# Altium PCB AVR最小系统板.PcbDoc (part 1 of 3)
Units mm, origin at the board's own origin, x right, y up, seen from the top; angles counter-clockwise.
Board outline 152.4 x 101.6 mm, 2 copper layers (Top Layer, Bottom Layer); 29 components, 54 nets, 170 pads, 0 vias.
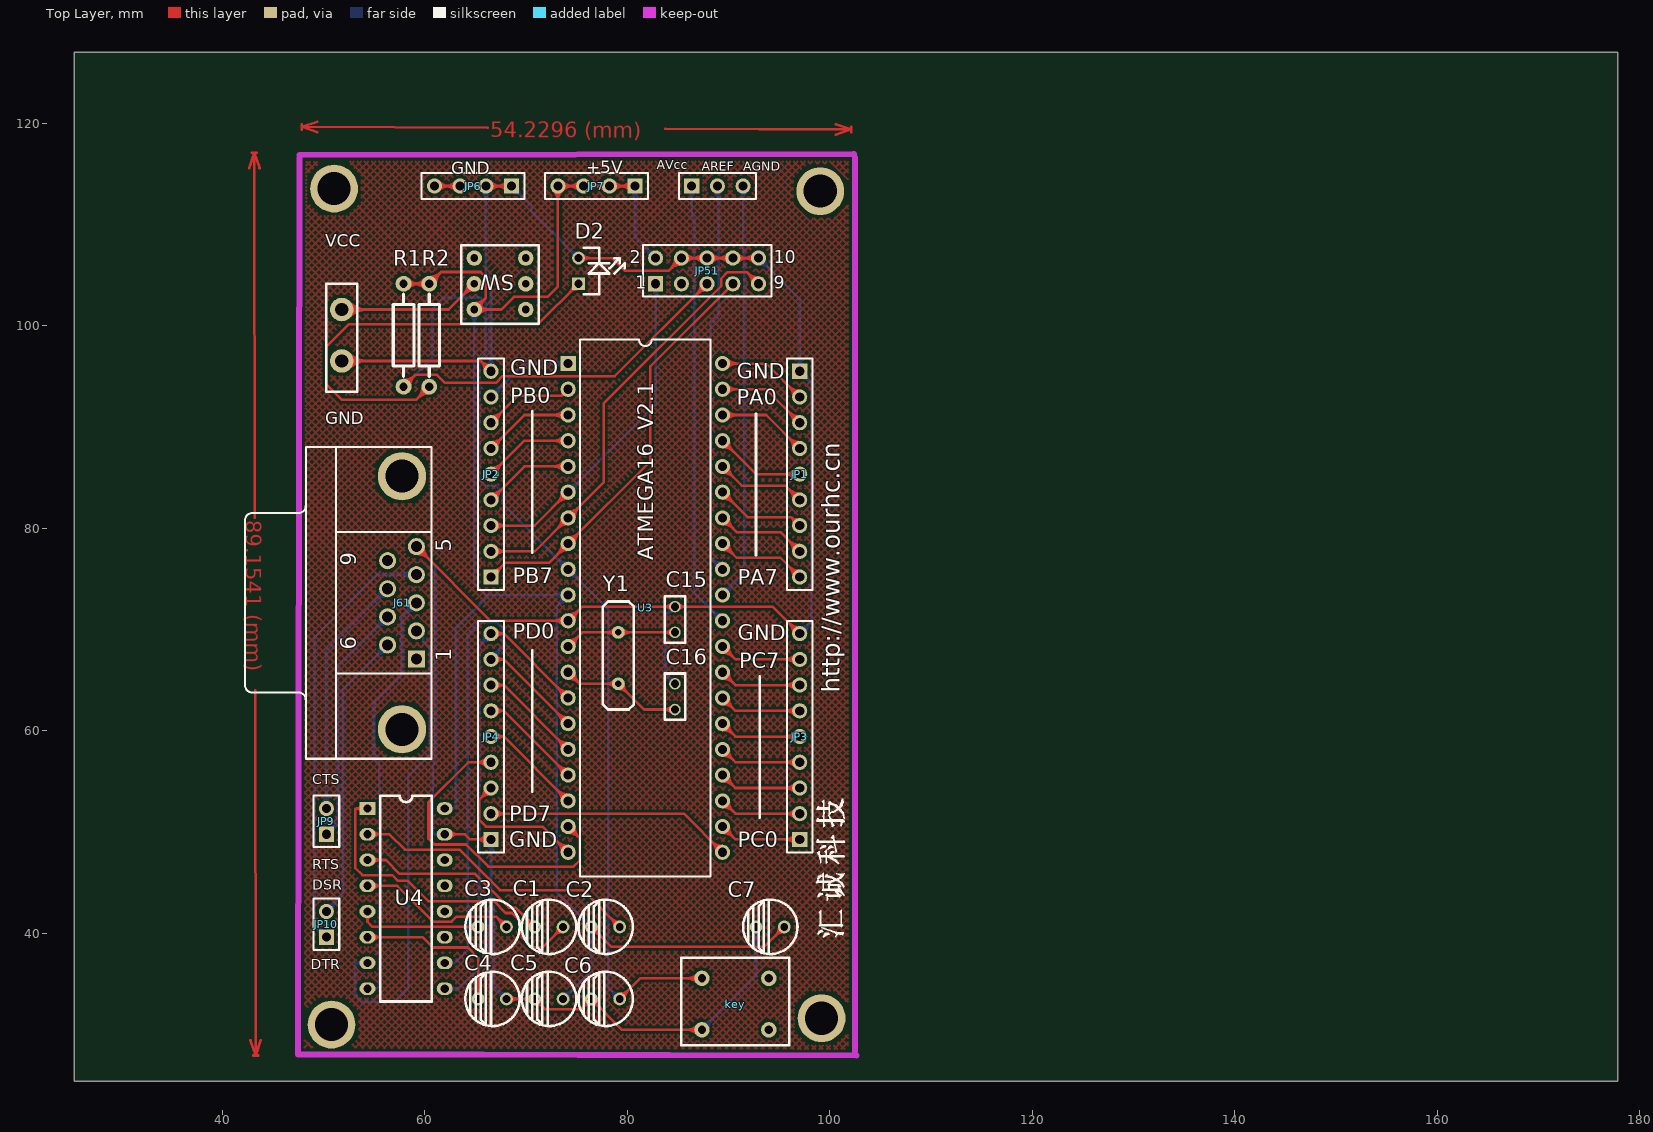
[diagram p0: Top Layer view]
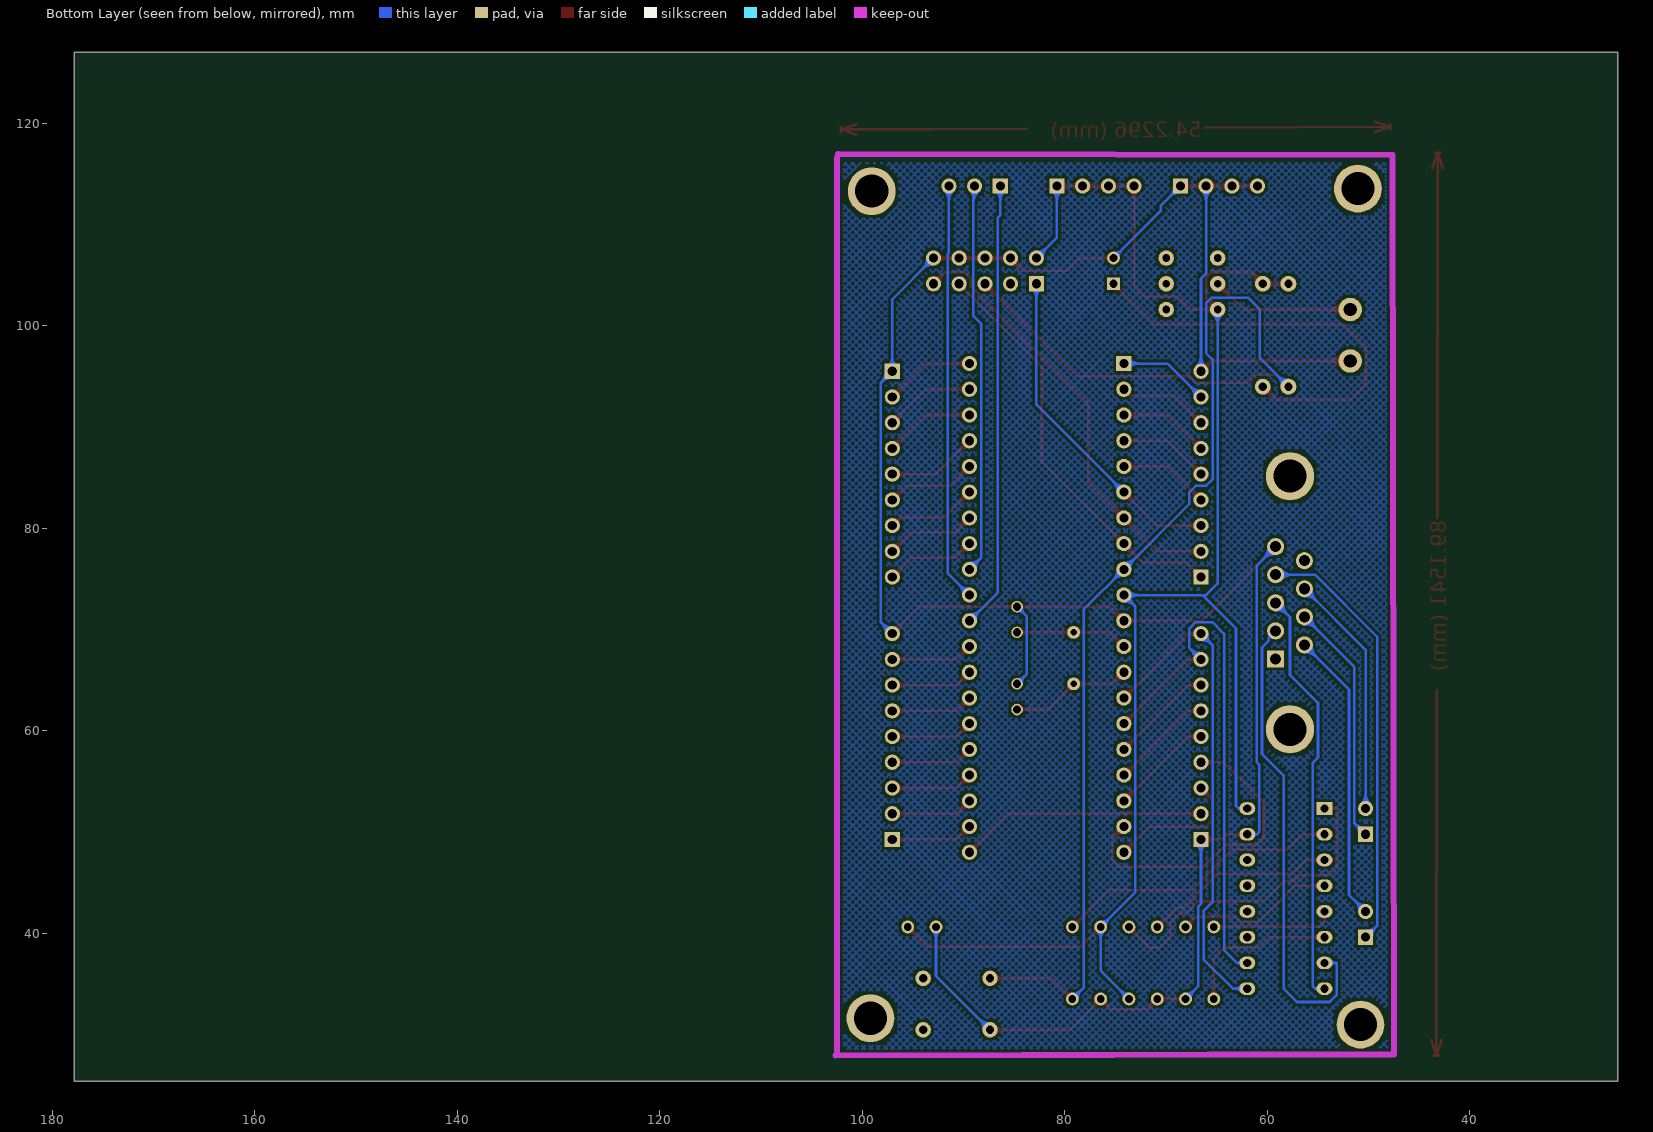
[diagram p1: Bottom Layer view, seen from below]

## Layer stack, top to bottom
Top Layer: signal copper 0.0356
Dielectric: dielectric 0.32, FR-4, Dk 4.8
Bottom Layer: signal copper 0.0356

## Board outline
25.4,25.4 177.8,25.4 177.8,127 25.4,127

## Design rules (kind name [scope] priority, off if disabled: settings)
Clearance [All] p1: gap=0.254
ComponentClearance [All] p1: gap=0.254 collisioncheckmode=0 verticalgap=0.254
PolygonConnect [All] p1: connectstyle=Relief reliefconductorwidth=0.254 reliefentries=4 polygonreliefangle="90 Angle"
RoutingVias [All] p1: holewidth=0.711 width=1.27 viastyle="Through Hole" minholewidth=0.711 minwidth=1.27 maxholewidth=0.711 maxwidth=1.27
SolderMaskExpansion [All] p1: expansion=0.102
TestPointUsage [All] p1: valid=0 allowmultiple=FALSE
Testpoint [All] p1: side=15 testpointundercomponent=TRUE minsize=1.016 maxsize=2.54 preferedsize=1.524 minholesize=0 maxholesize=1.016 preferedholesize=0.813 testpointgrid=0.025 style=1023 order=0123456789
Width [All] p1: maxlimit=0.254 minlimit=0.254 preferedwidth=0.254
17 further rules are at their usual default settings.

## Classes and differential pairs
component class Sheet1: 4/6 7/8 11 C1 C2 C3 C4 C5 C6 C7 C15 C16 D2 J61 JP1 JP2 JP3 JP4 JP5 key U3

## Components (designator, comment, footprint, x,y, rotation, side; value= is the part's Value field where it differs from the comment)
11 "power" power1 55.88,94.996 r90 top
C1 "1uf" cap2 78.232,40.64 r180 top
C2 "1uf" cap2 83.82,40.64 r180 top
C3 "1uf" cap2 72.644,40.64 r180 top
C4 "1uf" cap2 72.644,33.528 r180 top
C5 "1uf" cap2 78.232,33.528 r180 top
C6 "10uf" cap2 83.82,33.528 r180 top
C7 "360u\15v" cap2 100.076,40.64 r180 top
C15 "15p" RAD0.3 84.709,69.215 r90 top
C16 "15p" RAD0.3 84.709,61.595 r90 top
D2 "LED" LED 75.692,106.172 r270 top
J61 "D Connector 9" DSUB1.385-2H9 48.26,72.644 r90 top
JP1 "" HDR1X9 97.028,95.504 r270 top
JP2 "" HDR1X9 66.548,75.184 r90 top
JP3 "" HDR1X9 97.028,49.276 r90 top
JP4 "" HDR1X9 66.548,49.276 r90 top
JP5 "" HDR1X3 86.36,113.792 r0 top
JP6 "" HDR1X4 68.58,113.792 r180 top
JP7 "" HDR1X4 80.772,113.792 r180 top
JP9 "" HDR1X2 50.292,49.784 r90 top
JP10 "Header 3" HDR1X2 50.292,39.624 r90 top
JP51 "download" HDR2X5 82.804,104.14 r0 top
key "KEY" KEY-1 93.98,30.48 r180 top (schematic designator 1)
R1 "8.2k" AXIAL0.4 57.912,104.14 r270 top
R2 "4.7k" AXIAL0.4 60.452,104.14 r270 top
SW "KEY-33" key 70.612,104.14 r0 top (schematic designator RT)
U3 "ATmega16L-8PI" 40P6 81.788,72.136 r270 top
U4 "MAX232" DIP16 54.356,52.324 r0 top
Y1 "12M" CRYSTAL 80.137,67.183 r270 top

## Footprints (in the part's own frame and the unit in brackets; to place one, negate y for a bottom-side part, rotate by r counter-clockwise, add the part's x,y. Pads: shape width x height; smd on the part's side, far side on the other; paste and mask are expansions set on the pad)
40P6 [mm] "DIP; 40 Leads; Row Spacing 15.24 mm; Pitch 2.54 mm"
  rect 1.5x1.5 hole 0.9: 1(-24.13,-7.62)
  round 1.5 hole 0.9: 2(-21.59,-7.62) 3(-19.05,-7.62) 4(-16.51,-7.62) 5(-13.97,-7.62) 6(-11.43,-7.62) 7(-8.89,-7.62) 8(-6.35,-7.62) 9(-3.81,-7.62) 10(-1.27,-7.62) 11(1.27,-7.62) 12(3.81,-7.62) 13(6.35,-7.62) 14(8.89,-7.62) 15(11.43,-7.62) 16(13.97,-7.62) 17(16.51,-7.62) 18(19.05,-7.62) 19(21.59,-7.62) 20(24.13,-7.62) 21(24.13,7.62) 22(21.59,7.62) 23(19.05,7.62) 24(16.51,7.62) 25(13.97,7.62) 26(11.43,7.62) 27(8.89,7.62) 28(6.35,7.62) 29(3.81,7.62) 30(1.27,7.62) 31(-1.27,7.62) 32(-3.81,7.62) 33(-6.35,7.62) 34(-8.89,7.62) 35(-11.43,7.62) 36(-13.97,7.62) 37(-16.51,7.62) 38(-19.05,7.62) 39(-21.59,7.62) 40(-24.13,7.62)
  silkscreen extent -26.5,-6.45 26.5,6.45
AXIAL0.4 [mil]
  round 62 hole 32: 1(-0.15,-0.04) 2(399.85,-0.04)
  silkscreen extent 40,-40 360,40
cap2 [mil]
  round 50 hole 30: 1(180,0) 2(290,0)
  silkscreen extent 129,-106 340,106
CRYSTAL [mil]
  round 50 hole 25: 1(-100,-40) 2(100,-40)
  silkscreen extent -220,-100 200,20
DIP16 [mil]
  rect 62x49.21 hole 32: 1(-0.15,-0.04)
  oval 62x49.21 hole 32: 2(-0.15,-100.04) 3(-0.15,-200.04) 4(-0.15,-300.04) 5(-0.15,-400.04) 6(-0.15,-500.04) 7(-0.15,-600.04) 8(-0.15,-700.04) 9(299.85,-700.04) 10(299.85,-600.04) 11(299.85,-500.04) 12(299.85,-400.04) 13(299.85,-300.04) 14(299.85,-200.04) 15(299.85,-100.04) 16(299.85,-0.04)
  silkscreen extent 50,-750 250,50
DSUB1.385-2H9 [mm] "Connector; D Subminiature; 9 Position; Right Angle; Pitch 1.385 mm"
  rect 1.69x1.69 hole 1.09: 1(-5.54,-10.92)
  round 1.69 hole 1.09: 2(-2.77,-10.92) 3(0,-10.92) 4(2.77,-10.92) 5(5.54,-10.92) 6(-4.155,-8.08) 7(-1.385,-8.08) 8(1.385,-8.08) 9(4.155,-8.08)
  round 4.76 hole 3.26: 10(-12.495,-9.5) 11(12.495,-9.5)
  silkscreen extent -15.4,-12.4 15.4,6
HDR1X2 [mm] "Connector; Header; 2 Position"
  rect 1.5x1.5 hole 0.9: 1(0,0)
  round 1.5 hole 0.9: 2(2.54,0)
  silkscreen extent -1.27,-1.27 3.81,1.27
HDR1X3 [mm] "Connector; Header; 3 Position"
  rect 1.5x1.5 hole 0.9: 1(0,0)
  round 1.5 hole 0.9: 2(2.54,0) 3(5.08,0)
  silkscreen extent -1.27,-1.27 6.35,1.27
HDR1X4 [mm] "Connector; Header; 4 Position"
  rect 1.5x1.5 hole 0.9: 1(0,0)
  round 1.5 hole 0.9: 2(2.54,0) 3(5.08,0) 4(7.62,0)
  silkscreen extent -1.27,-1.27 8.89,1.27
HDR1X9 [mm] "Connector; Header; 9 Position"
  rect 1.5x1.5 hole 0.9: 1(0,0)
  round 1.5 hole 0.9: 2(2.54,0) 3(5.08,0) 4(7.62,0) 5(10.16,0) 6(12.7,0) 7(15.24,0) 8(17.78,0) 9(20.32,0)
  silkscreen extent -1.27,-1.27 21.59,1.27
HDR2X5 [mm] "Connector; Header; 5x2 Position"
  rect 1.5x1.5 hole 0.9: 1(0,0)
  round 1.5 hole 0.9: 2(0,2.54) 3(2.54,0) 4(2.54,2.54) 5(5.08,0) 6(5.08,2.54) 7(7.62,0) 8(7.62,2.54) 9(10.16,0) 10(10.16,2.54)
  silkscreen extent -1.27,-1.27 11.43,3.81
key [mil]
  round 60 hole 30: 0(-225,100) 1(-225,0) 2(-225,-100) 3(-25,-100) 4(-25,0) 5(-25,100)
  silkscreen extent -275,-155 25,150
KEY-1 [mil] "KEY"
  round 60 hole 32: 0(0,0) 1(260,0) 2(0,-200) 3(260,-200)
  silkscreen extent -80,-280 340,60
LED [mil]
  rect 50x50 hole 32: 1(80,-20)
  round 50 hole 32: 2(-20,-20)
  silkscreen extent -60,0 120,160
power1 [mm] "power"
  round 2.32 hole 1.32: 2(1.524,4.064) "VCC +5V"(6.604,4.064)
  silkscreen extent -1.52,2.54 9.14,5.59
RAD0.3 [mil]
  round 45 hole 32: 1(20,0) 2(120,0)
  silkscreen extent -20,-40 160,40

## Part data
C1 C2 C3 C4 C5 C6 C7: library part "CAPACITOR POL", "Capacitor"
C15 C16: library part CAP, "Capacitor"
J61: "Receptacle Assembly, 9 Position, Right Angle"
JP1 JP2 JP3 JP4: library part "Header 9", "Header, 9-Pin"
JP5: library part "Header 3", "Header, 3-Pin"
JP6 JP7: library part "Header 4", "Header, 4-Pin"
JP9 JP10: library part "Header 2", "Header, 2-Pin"
JP51: library part "Header 5X2", "Header, 5-Pin, Dual row"
R1 R2: library part RES2
U3: "8-Bit AVR Microcontroller with 16K Bytes of In-System Programmable Flash Memory"
Y1: library part CRYSTAL, "Crystal"

## Free pads (board coordinates)
  round 4.72 hole 3.267: 0(51.054,113.538) 1(99.06,113.284) 2(50.8,30.988) 3(99.187,31.623)

## Nets (pads, with @x,y where several pads share a name; then routed paths per layer and width w, separated by ;. In a path a pad name is that pad's centre, name@x,y a point inside that pad or via, vN(x,y) a via of type N, cw(c..) or ccw(c..) an arc to the next point about the centre after c; other vN are vias at no path point)
4: J61.4 JP10.1 | length 67.4
  Bottom Layer w0.254: JP10.1@50.292,39.624 49.149,40.767 49.149,69.291 55.272,75.414 J61.4@59.18,75.414 ; 49.228,40.688 cw(c48.165,39.624) JP10.1@49.669,39.624 ; 49.228,40.688 ccw(c50.292,41.751) JP10.1@50.292,40.247 ; 49.228,40.688 cw(c48.165,39.624) JP10.1@49.669,39.624 ; 49.228,40.688 ccw(c50.292,41.751) JP10.1@50.292,40.247 ; 49.228,40.688 cw(c48.165,39.624) JP10.1@49.669,39.624 ; 49.228,40.688 ccw(c50.292,41.751) JP10.1@50.292,40.247 ; JP10.1@49.662,40.254 cw(c49.032,39.624) JP10.1@49.923,39.624 ; JP10.1@49.662,40.254 ccw(c50.292,40.884) JP10.1@50.292,39.993 ; JP10.1@49.662,40.254 cw(c49.032,39.624) JP10.1@49.923,39.624 ; JP10.1@49.662,40.254 ccw(c50.292,40.884) JP10.1@50.292,39.993 ; JP10.1@49.662,40.254 cw(c49.032,39.624) JP10.1@49.923,39.624 ; JP10.1@49.662,40.254 ccw(c50.292,40.884) JP10.1@50.292,39.993 ; 57.447,75.414 cw(c57.447,73.681) J61.4@58.672,74.906 ; 57.447,75.414 ccw(c57.447,77.147) J61.4@58.672,75.922 ; 57.447,75.414 cw(c57.447,73.681) J61.4@58.672,74.906 ; 57.447,75.414 ccw(c57.447,77.147) J61.4@58.672,75.922 ; 57.447,75.414 cw(c57.447,73.681) J61.4@58.672,74.906 ; 57.447,75.414 ccw(c57.447,77.147) J61.4@58.672,75.922 ; 58.06,75.414 cw(c58.06,74.294) J61.4@58.852,75.086 ; 58.06,75.414 ccw(c58.06,76.534) J61.4@58.852,75.742 ; 58.06,75.414 cw(c58.06,74.294) J61.4@58.852,75.086 ; 58.06,75.414 ccw(c58.06,76.534) J61.4@58.852,75.742 ; 58.06,75.414 cw(c58.06,74.294) J61.4@58.852,75.086 ; 58.06,75.414 ccw(c58.06,76.534) J61.4@58.852,75.742
6: J61.6 JP10.2 | length 53.6
  Bottom Layer w0.254: JP10.2@50.292,42.164 51.931,43.803 51.931,64.08 J61.6@56.34,68.489 ; JP10.2@50.292,42.533 ccw(c50.292,43.424) 50.922,42.794 ; JP10.2@50.292,42.533 ccw(c50.292,43.424) 50.922,42.794 ; JP10.2@50.292,42.533 ccw(c50.292,43.424) 50.922,42.794 ; JP10.2@50.292,42.787 ccw(c50.292,44.291) 51.356,43.228 ; JP10.2@50.292,42.787 ccw(c50.292,44.291) 51.356,43.228 ; JP10.2@50.292,42.787 ccw(c50.292,44.291) 51.356,43.228 ; JP10.2@50.661,42.164 cw(c51.552,42.164) 50.922,42.794 ; JP10.2@50.661,42.164 cw(c51.552,42.164) 50.922,42.794 ; JP10.2@50.661,42.164 cw(c51.552,42.164) 50.922,42.794 ; JP10.2@50.915,42.164 cw(c52.419,42.164) 51.356,43.228 ; JP10.2@50.915,42.164 cw(c52.419,42.164) 51.356,43.228 ; JP10.2@50.915,42.164 cw(c52.419,42.164) 51.356,43.228 ; 55.114,67.263 cw(c56.34,66.038) J61.6@56.34,67.771 ; 55.114,67.263 ccw(c53.889,68.489) J61.6@55.622,68.489 ; 55.114,67.263 cw(c56.34,66.038) J61.6@56.34,67.771 ; 55.114,67.263 ccw(c53.889,68.489) J61.6@55.622,68.489 ; 55.114,67.263 cw(c56.34,66.038) J61.6@56.34,67.771 ; 55.114,67.263 ccw(c53.889,68.489) J61.6@55.622,68.489 ; 55.548,67.697 cw(c56.34,66.905) J61.6@56.34,68.025 ; 55.548,67.697 ccw(c54.756,68.489) J61.6@55.876,68.489 ; 55.548,67.697 cw(c56.34,66.905) J61.6@56.34,68.025 ; 55.548,67.697 ccw(c54.756,68.489) J61.6@55.876,68.489 ; 55.548,67.697 cw(c56.34,66.905) J61.6@56.34,68.025 ; 55.548,67.697 ccw(c54.756,68.489) J61.6@55.876,68.489
7: J61.7 JP9.1 | length 48.7
  Bottom Layer w0.254: JP9.1@50.292,49.784 51.423,50.915 51.423,66.342 J61.7@56.34,71.259 ; JP9.1@50.292,50.153 ccw(c50.292,51.044) JP9.1@50.922,50.414 ; JP9.1@50.292,50.153 ccw(c50.292,51.044) JP9.1@50.922,50.414 ; JP9.1@50.292,50.153 ccw(c50.292,51.044) JP9.1@50.922,50.414 ; JP9.1@50.292,50.407 ccw(c50.292,51.911) 51.356,50.848 ; JP9.1@50.292,50.407 ccw(c50.292,51.911) 51.356,50.848 ; JP9.1@50.292,50.407 ccw(c50.292,51.911) 51.356,50.848 ; JP9.1@50.661,49.784 cw(c51.552,49.784) JP9.1@50.922,50.414 ; JP9.1@50.661,49.784 cw(c51.552,49.784) JP9.1@50.922,50.414 ; JP9.1@50.661,49.784 cw(c51.552,49.784) JP9.1@50.922,50.414 ; JP9.1@50.915,49.784 cw(c52.419,49.784) 51.356,50.848 ; JP9.1@50.915,49.784 cw(c52.419,49.784) 51.356,50.848 ; JP9.1@50.915,49.784 cw(c52.419,49.784) 51.356,50.848 ; 55.114,70.033 cw(c56.34,68.808) J61.7@56.34,70.541 ; 55.114,70.033 ccw(c53.889,71.259) J61.7@55.622,71.259 ; 55.114,70.033 cw(c56.34,68.808) J61.7@56.34,70.541 ; 55.114,70.033 ccw(c53.889,71.259) J61.7@55.622,71.259 ; 55.114,70.033 cw(c56.34,68.808) J61.7@56.34,70.541 ; 55.114,70.033 ccw(c53.889,71.259) J61.7@55.622,71.259 ; 55.548,70.467 cw(c56.34,69.675) J61.7@56.34,70.795 ; 55.548,70.467 ccw(c54.756,71.259) J61.7@55.876,71.259 ; 55.548,70.467 cw(c56.34,69.675) J61.7@56.34,70.795 ; 55.548,70.467 ccw(c54.756,71.259) J61.7@55.876,71.259 ; 55.548,70.467 cw(c56.34,69.675) J61.7@56.34,70.795 ; 55.548,70.467 ccw(c54.756,71.259) J61.7@55.876,71.259
8: J61.8 JP9.2 | length 48.9
  Bottom Layer w0.254: JP9.2@50.292,52.324 50.292,67.981 J61.8@56.34,74.029 ; JP9.2@49.851,52.765 ccw(c48.788,53.828) 50.292,53.828 ; JP9.2@49.851,52.765 ccw(c48.788,53.828) 50.292,53.828 ; JP9.2@49.851,52.765 ccw(c48.788,53.828) 50.292,53.828 ; JP9.2@50.031,52.585 ccw(c49.401,53.215) 50.292,53.215 ; JP9.2@50.031,52.585 ccw(c49.401,53.215) 50.292,53.215 ; JP9.2@50.031,52.585 ccw(c49.401,53.215) 50.292,53.215 ; 50.292,53.215 ccw(c51.183,53.215) JP9.2@50.553,52.585 ; 50.292,53.215 ccw(c51.183,53.215) JP9.2@50.553,52.585 ; 50.292,53.215 ccw(c51.183,53.215) JP9.2@50.553,52.585 ; 50.292,53.828 ccw(c51.796,53.828) JP9.2@50.733,52.765 ; 50.292,53.828 ccw(c51.796,53.828) JP9.2@50.733,52.765 ; 50.292,53.828 ccw(c51.796,53.828) JP9.2@50.733,52.765 ; 55.114,72.803 cw(c56.34,71.578) J61.8@56.34,73.311 ; 55.114,72.803 ccw(c53.889,74.029) J61.8@55.622,74.029 ; 55.114,72.803 cw(c56.34,71.578) J61.8@56.34,73.311 ; 55.114,72.803 ccw(c53.889,74.029) J61.8@55.622,74.029 ; 55.114,72.803 cw(c56.34,71.578) J61.8@56.34,73.311 ; 55.114,72.803 ccw(c53.889,74.029) J61.8@55.622,74.029 ; 55.548,73.237 cw(c56.34,72.445) J61.8@56.34,73.565 ; 55.548,73.237 ccw(c54.756,74.029) J61.8@55.876,74.029 ; 55.548,73.237 cw(c56.34,72.445) J61.8@56.34,73.565 ; 55.548,73.237 ccw(c54.756,74.029) J61.8@55.876,74.029 ; 55.548,73.237 cw(c56.34,72.445) J61.8@56.34,73.565 ; 55.548,73.237 ccw(c54.756,74.029) J61.8@55.876,74.029
GND: 11.2 C4.1 C5.2 C6.2 C7.2 C15.2 C16.2 D2.2 J61.5 JP1.1 JP2.9 JP3.9 JP4.1 JP6.1 JP6.2 JP6.3 JP6.4 JP51.4 JP51.6 JP51.8 JP51.10 key.1 U3.11 U4.15 | length 682.3
  Top Layer w0.254: 11.2@51.816,96.52 65.532,96.52 ; J61.5@59.18,78.184 66.498,70.866 U3.11@74.168,70.866 75.565,72.263 C15.2@84.709,72.263 94.361,72.263 JP3.9@97.028,69.596 ; JP6.4@60.96,113.792 JP6.3@63.5,113.792 JP6.2@66.04,113.792 JP6.1@68.58,113.792 ; U4.15@61.972,49.783 63.983,49.783 64.49,49.276 JP4.1@66.548,49.276 ; JP2.9@66.548,95.504 65.532,96.52 ; C4.1@68.072,33.528 C5.2@70.866,33.528 71.882,32.512 75.438,32.512 C6.2@76.454,33.528 79.502,30.48 key.1@87.376,30.48 ; D2.2@75.184,106.68 78.486,106.68 79.756,105.41 84.074,105.41 JP51.4@85.344,106.68 JP51.8@90.424,106.68 JP51.10@92.964,106.68 ; 11.2@52.187,96.149 cw(c53.083,95.253) 53.083,96.52 ; 11.2@52.187,96.149 cw(c53.083,95.253) 53.083,96.52 ; 11.2@52.187,96.149 cw(c53.083,95.253) 53.083,96.52 ; 11.2@52.187,96.891 ccw(c53.083,97.787) 53.083,96.52 ; 11.2@52.187,96.891 ccw(c53.083,97.787) 53.083,96.52 ; 11.2@52.187,96.891 ccw(c53.083,97.787) 53.083,96.52 ; 11.2@52.367,95.969 cw(c53.697,94.639) 53.697,96.52 ; 11.2@52.367,95.969 cw(c53.697,94.639) 53.697,96.52 ; 11.2@52.367,95.969 cw(c53.697,94.639) 53.697,96.52 ; 11.2@52.367,97.071 ccw(c53.697,98.401) 53.697,96.52 ; 11.2@52.367,97.071 ccw(c53.697,98.401) 53.697,96.52 ; 11.2@52.367,97.071 ccw(c53.697,98.401) 53.697,96.52 ; 11.2@52.546,95.79 cw(c54.31,94.026) 54.31,96.52 ; 11.2@52.546,95.79 cw(c54.31,94.026) 54.31,96.52 ; 11.2@52.546,95.79 cw(c54.31,94.026) 54.31,96.52 ; 11.2@52.546,97.25 ccw(c54.31,99.014) 54.31,96.52 ; 11.2@52.546,97.25 ccw(c54.31,99.014) 54.31,96.52 ; 11.2@52.546,97.25 ccw(c54.31,99.014) 54.31,96.52 ; J61.5@59.18,77.466 cw(c59.18,75.733) 60.406,76.958 ; J61.5@59.18,77.466 cw(c59.18,75.733) 60.406,76.958 ; J61.5@59.18,77.466 cw(c59.18,75.733) 60.406,76.958 ; J61.5@59.18,77.72 cw(c59.18,76.6) 59.972,77.392 ; J61.5@59.18,77.72 cw(c59.18,76.6) 59.972,77.392 ; J61.5@59.18,77.72 cw(c59.18,76.6) 59.972,77.392 ; J61.5@59.644,78.184 ccw(c60.764,78.184) 59.972,77.392 ; J61.5@59.644,78.184 ccw(c60.764,78.184) 59.972,77.392 ; J61.5@59.644,78.184 ccw(c60.764,78.184) 59.972,77.392 ; J61.5@59.898,78.184 ccw(c61.631,78.184) 60.406,76.958 ; J61.5@59.898,78.184 ccw(c61.631,78.184) 60.406,76.958 ; J61.5@59.898,78.184 ccw(c61.631,78.184) 60.406,76.958 ; JP6.4@61.221,113.531 cw(c61.851,112.901) 61.851,113.792 ; JP6.4@61.221,113.531 cw(c61.851,112.901) 61.851,113.792 ; JP6.4@61.221,113.531 cw(c61.851,112.901) 61.851,113.792 ; JP6.4@61.221,114.053 ccw(c61.851,114.683) 61.851,113.792 ; JP6.4@61.221,114.053 ccw(c61.851,114.683) 61.851,113.792 ; JP6.4@61.221,114.053 ccw(c61.851,114.683) 61.851,113.792 ; JP6.4@61.401,113.351 cw(c62.464,112.288) 62.464,113.792 ; JP6.4@61.401,113.351 cw(c62.464,112.288) 62.464,113.792 ; JP6.4@61.401,113.351 cw(c62.464,112.288) 62.464,113.792 ; JP6.4@61.401,114.233 ccw(c62.464,115.296) 62.464,113.792 ; JP6.4@61.401,114.233 ccw(c62.464,115.296) 62.464,113.792 ; JP6.4@61.401,114.233 ccw(c62.464,115.296) 62.464,113.792 ; 61.996,113.792 cw(c61.996,112.288) JP6.3@63.059,113.351 ; 61.996,113.792 ccw(c61.996,115.296) JP6.3@63.059,114.233 ; 61.996,113.792 cw(c61.996,112.288) JP6.3@63.059,113.351 ; 61.996,113.792 ccw(c61.996,115.296) JP6.3@63.059,114.233 ; 61.996,113.792 cw(c61.996,112.288) JP6.3@63.059,113.351 ; 61.996,113.792 ccw(c61.996,115.296) JP6.3@63.059,114.233 ; U4.15@62.487,49.431 cw(c63.337,48.581) 63.337,49.783 ; U4.15@62.487,49.431 cw(c63.337,48.581) 63.337,49.783 ; U4.15@62.487,49.431 cw(c63.337,48.581) 63.337,49.783 ; U4.15@62.487,50.135 ccw(c63.337,50.985) 63.337,49.783 ; U4.15@62.487,50.135 ccw(c63.337,50.985) 63.337,49.783 ; U4.15@62.487,50.135 ccw(c63.337,50.985) 63.337,49.783 ; 62.609,113.792 cw(c62.609,112.901) JP6.3@63.239,113.531 ; 62.609,113.792 ccw(c62.609,114.683) JP6.3@63.239,114.053 ; 62.609,113.792 cw(c62.609,112.901) JP6.3@63.239,113.531 ; 62.609,113.792 ccw(c62.609,114.683) JP6.3@63.239,114.053 ; 62.609,113.792 cw(c62.609,112.901) JP6.3@63.239,113.531 ; 62.609,113.792 ccw(c62.609,114.683) JP6.3@63.239,114.053 ; JP6.3@63.761,113.531 cw(c64.391,112.901) 64.391,113.792 ; JP6.3@63.761,113.531 cw(c64.391,112.901) 64.391,113.792 ; JP6.3@63.761,113.531 cw(c64.391,112.901) 64.391,113.792 ; JP6.3@63.761,114.053 ccw(c64.391,114.683) 64.391,113.792 ; JP6.3@63.761,114.053 ccw(c64.391,114.683) 64.391,113.792 ; JP6.3@63.761,114.053 ccw(c64.391,114.683) 64.391,113.792 ; JP6.3@63.941,113.351 cw(c65.004,112.288) 65.004,113.792 ; JP6.3@63.941,113.351 cw(c65.004,112.288) 65.004,113.792 ; JP6.3@63.941,113.351 cw(c65.004,112.288) 65.004,113.792 ; JP6.3@63.941,114.233 ccw(c65.004,115.296) 65.004,113.792 ; JP6.3@63.941,114.233 ccw(c65.004,115.296) 65.004,113.792 ; JP6.3@63.941,114.233 ccw(c65.004,115.296) 65.004,113.792 ; 64.536,113.792 cw(c64.536,112.288) JP6.2@65.599,113.351 ; 64.536,113.792 ccw(c64.536,115.296) JP6.2@65.599,114.233 ; 64.536,113.792 cw(c64.536,112.288) JP6.2@65.599,113.351 ; 64.536,113.792 ccw(c64.536,115.296) JP6.2@65.599,114.233 ; 64.536,113.792 cw(c64.536,112.288) JP6.2@65.599,113.351 ; 64.536,113.792 ccw(c64.536,115.296) JP6.2@65.599,114.233 ; 65.044,49.276 cw(c65.044,47.772) JP4.1@66.107,48.835 ; 65.044,49.276 ccw(c65.044,50.78) JP4.1@66.107,49.717 ; 65.044,49.276 cw(c65.044,47.772) JP4.1@66.107,48.835 ; 65.044,49.276 ccw(c65.044,50.78) JP4.1@66.107,49.717 ; 65.044,49.276 cw(c65.044,47.772) JP4.1@66.107,48.835 ; 65.044,49.276 ccw(c65.044,50.78) JP4.1@66.107,49.717 ; 65.149,113.792 cw(c65.149,112.901) JP6.2@65.779,113.531 ; 65.149,113.792 ccw(c65.149,114.683) JP6.2@65.779,114.053 ; 65.149,113.792 cw(c65.149,112.901) JP6.2@65.779,113.531 ; 65.149,113.792 ccw(c65.149,114.683) JP6.2@65.779,114.053 ; 65.149,113.792 cw(c65.149,112.901) JP6.2@65.779,113.531 ; 65.149,113.792 ccw(c65.149,114.683) JP6.2@65.779,114.053 ; 65.532,96.52 cw(c64.581,95.569) JP2.9@65.925,95.524 ; 65.532,96.52 ccw(c66.483,97.471) JP2.9@66.528,96.127 ; 65.532,96.52 cw(c64.581,95.569) JP2.9@65.925,95.524 ; 65.532,96.52 ccw(c66.483,97.471) JP2.9@66.528,96.127 ; 65.532,96.52 cw(c64.581,95.569) JP2.9@65.925,95.524 ; 65.532,96.52 ccw(c66.483,97.471) JP2.9@66.528,96.127 ; 65.657,49.276 cw(c65.657,48.385) JP4.1@66.287,49.015 ; 65.657,49.276 ccw(c65.657,50.167) JP4.1@66.287,49.537 ; 65.657,49.276 cw(c65.657,48.385) JP4.1@66.287,49.015 ; 65.657,49.276 ccw(c65.657,50.167) JP4.1@66.287,49.537 ; 65.657,49.276 cw(c65.657,48.385) JP4.1@66.287,49.015 ; 65.657,49.276 ccw(c65.657,50.167) JP4.1@66.287,49.537 ; 65.946,96.106 cw(c65.383,95.542) JP2.9@66.179,95.516 ; 65.946,96.106 ccw(c66.51,96.669) JP2.9@66.536,95.873 ; 65.946,96.106 cw(c65.383,95.542) JP2.9@66.179,95.516 ; 65.946,96.106 ccw(c66.51,96.669) JP2.9@66.536,95.873 ; 65.946,96.106 cw(c65.383,95.542) JP2.9@66.179,95.516 ; 65.946,96.106 ccw(c66.51,96.669) JP2.9@66.536,95.873 ; JP6.2@66.301,113.531 cw(c66.931,112.901) 66.931,113.792 ; JP6.2@66.301,113.531 cw(c66.931,112.901) 66.931,113.792 ; JP6.2@66.301,113.531 cw(c66.931,112.901) 66.931,113.792 ; JP6.2@66.301,114.053 ccw(c66.931,114.683) 66.931,113.792 ; JP6.2@66.301,114.053 ccw(c66.931,114.683) 66.931,113.792 ; JP6.2@66.301,114.053 ccw(c66.931,114.683) 66.931,113.792 ; JP6.2@66.481,113.351 cw(c67.544,112.288) 67.544,113.792 ; JP6.2@66.481,113.351 cw(c67.544,112.288) 67.544,113.792 ; JP6.2@66.481,113.351 cw(c67.544,112.288) 67.544,113.792 ; JP6.2@66.481,114.233 ccw(c67.544,115.296) 67.544,113.792 ; JP6.2@66.481,114.233 ccw(c67.544,115.296) 67.544,113.792 ; JP6.2@66.481,114.233 ccw(c67.544,115.296) 67.544,113.792 ; 67.076,113.792 cw(c67.076,112.288) JP6.1@68.139,113.351 ; 67.076,113.792 ccw(c67.076,115.296) JP6.1@68.139,114.233 ; 67.076,113.792 cw(c67.076,112.288) JP6.1@68.139,113.351 ; 67.076,113.792 ccw(c67.076,115.296) JP6.1@68.139,114.233 ; 67.076,113.792 cw(c67.076,112.288) JP6.1@68.139,113.351 ; 67.076,113.792 ccw(c67.076,115.296) JP6.1@68.139,114.233 ; 67.689,113.792 cw(c67.689,112.901) JP6.1@68.319,113.531 ; 67.689,113.792 ccw(c67.689,114.683) JP6.1@68.319,114.053 ; 67.689,113.792 cw(c67.689,112.901) JP6.1@68.319,113.531 ; 67.689,113.792 ccw(c67.689,114.683) JP6.1@68.319,114.053 ; 67.689,113.792 cw(c67.689,112.901) JP6.1@68.319,113.531 ; 67.689,113.792 ccw(c67.689,114.683) JP6.1@68.319,114.053 ; C4.1@68.431,33.169 cw(c69.298,32.302) 69.298,33.528 ; C4.1@68.431,33.169 cw(c69.298,32.302) 69.298,33.528 ; C4.1@68.431,33.169 cw(c69.298,32.302) 69.298,33.528 ; C4.1@68.431,33.887 ccw(c69.298,34.754) 69.298,33.528 ; C4.1@68.431,33.887 ccw(c69.298,34.754) 69.298,33.528 ; C4.1@68.431,33.887 ccw(c69.298,34.754) 69.298,33.528 ; 69.64,33.528 cw(c69.64,32.302) C5.2@70.507,33.169 ; 69.64,33.528 ccw(c69.64,34.754) C5.2@70.507,33.887 ; 69.64,33.528 cw(c69.64,32.302) C5.2@70.507,33.169 ; 69.64,33.528 ccw(c69.64,34.754) C5.2@70.507,33.887 ; 69.64,33.528 cw(c69.64,32.302) C5.2@70.507,33.169 ; 69.64,33.528 ccw(c69.64,34.754) C5.2@70.507,33.887 ; C5.2@70.866,33.02 cw(c70.866,31.794) 71.733,32.661 ; C5.2@70.866,33.02 cw(c70.866,31.794) 71.733,32.661 ; C5.2@70.866,33.02 cw(c70.866,31.794) 71.733,32.661 ; C5.2@71.374,33.528 ccw(c72.6,33.528) 71.733,32.661 ; C5.2@71.374,33.528 ccw(c72.6,33.528) 71.733,32.661 ; C5.2@71.374,33.528 ccw(c72.6,33.528) 71.733,32.661 ; 72.664,70.866 cw(c72.664,69.362) U3.11@73.727,70.425 ; 72.664,70.866 ccw(c72.664,72.37) U3.11@73.727,71.307 ; 72.664,70.866 cw(c72.664,69.362) U3.11@73.727,70.425 ; 72.664,70.866 ccw(c72.664,72.37) U3.11@73.727,71.307 ; 72.664,70.866 cw(c72.664,69.362) U3.11@73.727,70.425 ; 72.664,70.866 ccw(c72.664,72.37) U3.11@73.727,71.307 ; 73.277,70.866 cw(c73.277,69.975) U3.11@73.907,70.605 ; 73.277,70.866 ccw(c73.277,71.757) U3.11@73.907,71.127 ; 73.277,70.866 cw(c73.277,69.975) U3.11@73.907,70.605 ; 73.277,70.866 ccw(c73.277,71.757) U3.11@73.907,71.127 ; 73.277,70.866 cw(c73.277,69.975) U3.11@73.907,70.605 ; 73.277,70.866 ccw(c73.277,71.757) U3.11@73.907,71.127 ; U3.11@74.168,71.235 ccw(c74.168,72.126) 74.798,71.496 ; U3.11@74.168,71.235 ccw(c74.168,72.126) 74.798,71.496 ; U3.11@74.168,71.235 ccw(c74.168,72.126) 74.798,71.496 ; U3.11@74.168,71.489 ccw(c74.168,72.993) 75.232,71.93 ; U3.11@74.168,71.489 ccw(c74.168,72.993) 75.232,71.93 ; U3.11@74.168,71.489 ccw(c74.168,72.993) 75.232,71.93 ; U3.11@74.537,70.866 cw(c75.428,70.866) 74.798,71.496 ; U3.11@74.537,70.866 cw(c75.428,70.866) 74.798,71.496 ; U3.11@74.537,70.866 cw(c75.428,70.866) 74.798,71.496 ; U3.11@74.791,70.866 cw(c76.295,70.866) 75.232,71.93 ; U3.11@74.791,70.866 cw(c76.295,70.866) 75.232,71.93 ; U3.11@74.791,70.866 cw(c76.295,70.866) 75.232,71.93 ; 75.587,32.661 cw(c76.454,31.794) C6.2@76.454,33.02 ; 75.587,32.661 ccw(c74.72,33.528) C6.2@75.946,33.528 ; 75.587,32.661 cw(c76.454,31.794) C6.2@76.454,33.02 ; 75.587,32.661 ccw(c74.72,33.528) C6.2@75.946,33.528 ; 75.587,32.661 cw(c76.454,31.794) C6.2@76.454,33.02 ; 75.587,32.661 ccw(c74.72,33.528) C6.2@75.946,33.528 ; 76.41,106.68 cw(c76.41,107.906) 75.543,107.039 ccw(c76.41,107.906) 76.41,106.68 ; 76.41,106.68 ccw(c76.41,105.454) 75.543,106.321 cw(c76.41,105.454) 76.41,106.68 ; C6.2@76.454,33.02 cw(c76.454,31.794) 77.321,32.661 ; C6.2@76.454,33.02 cw(c76.454,31.794) 77.321,32.661 ; C6.2@76.454,33.02 cw(c76.454,31.794) 77.321,32.661 ; C6.2@76.962,33.528 ccw(c78.188,33.528) 77.321,32.661 ; C6.2@76.962,33.528 ccw(c78.188,33.528) 77.321,32.661 ; C6.2@76.962,33.528 ccw(c78.188,33.528) 77.321,32.661 ; 83.636,72.263 cw(c83.636,71.19) C15.2@84.395,71.949 ; 83.636,72.263 ccw(c83.636,73.336) C15.2@84.395,72.577 ; 83.636,72.263 cw(c83.636,71.19) C15.2@84.395,71.949 ; 83.636,72.263 ccw(c83.636,73.336) C15.2@84.395,72.577 ; 83.636,72.263 cw(c83.636,71.19) C15.2@84.395,71.949 ; 83.636,72.263 ccw(c83.636,73.336) C15.2@84.395,72.577 ; 84.28,105.616 cw(c85.344,104.553) 85.344,106.057 ccw(c85.344,104.553) 84.28,105.616 ; 84.28,105.616 ccw(c83.217,106.68) 84.721,106.68 cw(c83.217,106.68) 84.28,105.616 ; 84.714,106.05 cw(c85.344,105.42) 85.344,106.311 ccw(c85.344,105.42) 84.714,106.05 ; 84.714,106.05 ccw(c84.084,106.68) 84.975,106.68 cw(c84.084,106.68) 84.714,106.05 ; C15.2@85.023,71.949 cw(c85.782,71.19) 85.782,72.263 ; C15.2@85.023,71.949 cw(c85.782,71.19) 85.782,72.263 ; C15.2@85.023,71.949 cw(c85.782,71.19) 85.782,72.263 ; C15.2@85.023,72.577 ccw(c85.782,73.336) 85.782,72.263 ; C15.2@85.023,72.577 ccw(c85.782,73.336) 85.782,72.263 ; C15.2@85.023,72.577 ccw(c85.782,73.336) 85.782,72.263 ; 85.843,30.48 cw(c85.843,28.947) key.1@86.927,30.031 ; 85.843,30.48 ccw(c85.843,32.013) key.1@86.927,30.929 ; 85.843,30.48 cw(c85.843,28.947) key.1@86.927,30.031 ; 85.843,30.48 ccw(c85.843,32.013) key.1@86.927,30.929 ; 85.843,30.48 cw(c85.843,28.947) key.1@86.927,30.031 ; 85.843,30.48 ccw(c85.843,32.013) key.1@86.927,30.929 ; 86.235,106.68 cw(c86.235,107.571) 85.605,106.941 ccw(c86.235,107.571) 86.235,106.68 ; 86.235,106.68 ccw(c86.235,105.789) 85.605,106.419 cw(c86.235,105.789) 86.235,106.68 ; 86.38,106.68 cw(c86.38,105.176) 87.443,106.239 ccw(c86.38,105.176) 86.38,106.68 ; 86.38,106.68 ccw(c86.38,108.184) 87.443,107.121 cw(c86.38,108.184) 86.38,106.68 ; 86.456,30.48 cw(c86.456,29.56) key.1@87.107,30.211 ; 86.456,30.48 ccw(c86.456,31.4) key.1@87.107,30.749 ; 86.456,30.48 cw(c86.456,29.56) key.1@87.107,30.211 ; 86.456,30.48 ccw(c86.456,31.4) key.1@87.107,30.749 ; 86.456,30.48 cw(c86.456,29.56) key.1@87.107,30.211 ; 86.456,30.48 ccw(c86.456,31.4) key.1@87.107,30.749 ; 86.848,106.68 cw(c86.848,108.184) 85.785,107.121 ccw(c86.848,108.184) 86.848,106.68 ; 86.848,106.68 ccw(c86.848,105.176) 85.785,106.239 cw(c86.848,105.176) 86.848,106.68 ; 86.993,106.68 cw(c86.993,105.789) 87.623,106.419 ccw(c86.993,105.789) 86.993,106.68 ; 86.993,106.68 ccw(c86.993,107.571) 87.623,106.941 cw(c86.993,107.571) 86.993,106.68 ; JP51.6@88.145,106.419 cw(c88.775,105.789) 88.775,106.68 ; JP51.6@88.145,106.419 cw(c88.775,105.789) 88.775,106.68 ; JP51.6@88.145,106.419 cw(c88.775,105.789) 88.775,106.68 ; JP51.6@88.145,106.941 ccw(c88.775,107.571) 88.775,106.68 ; JP51.6@88.145,106.941 ccw(c88.775,107.571) 88.775,106.68 ; JP51.6@88.145,106.941 ccw(c88.775,107.571) 88.775,106.68 ; JP51.6@88.325,106.239 cw(c89.388,105.176) 89.388,106.68 ; JP51.6@88.325,106.239 cw(c89.388,105.176) 89.388,106.68 ; JP51.6@88.325,106.239 cw(c89.388,105.176) 89.388,106.68 ; JP51.6@88.325,107.121 ccw(c89.388,108.184) 89.388,106.68 ; JP51.6@88.325,107.121 ccw(c89.388,108.184) 89.388,106.68 ; JP51.6@88.325,107.121 ccw(c89.388,108.184) 89.388,106.68 ; 88.92,106.68 cw(c88.92,105.176) JP51.8@89.983,106.239 ; 88.92,106.68 ccw(c88.92,108.184) JP51.8@89.983,107.121 ; 88.92,106.68 cw(c88.92,105.176) JP51.8@89.983,106.239 ; 88.92,106.68 ccw(c88.92,108.184) JP51.8@89.983,107.121 ; 88.92,106.68 cw(c88.92,105.176) JP51.8@89.983,106.239 ; 88.92,106.68 ccw(c88.92,108.184) JP51.8@89.983,107.121 ; 89.533,106.68 cw(c89.533,105.789) JP51.8@90.163,106.419 ; 89.533,106.68 ccw(c89.533,107.571) JP51.8@90.163,106.941 ; 89.533,106.68 cw(c89.533,105.789) JP51.8@90.163,106.419 ; 89.533,106.68 ccw(c89.533,107.571) JP51.8@90.163,106.941 ; 89.533,106.68 cw(c89.533,105.789) JP51.8@90.163,106.419 ; 89.533,106.68 ccw(c89.533,107.571) JP51.8@90.163,106.941 ; JP51.8@90.685,106.419 cw(c91.315,105.789) 91.315,106.68 ; JP51.8@90.685,106.419 cw(c91.315,105.789) 91.315,106.68 ; JP51.8@90.685,106.419 cw(c91.315,105.789) 91.315,106.68 ; JP51.8@90.685,106.941 ccw(c91.315,107.571) 91.315,106.68 ; JP51.8@90.685,106.941 ccw(c91.315,107.571) 91.315,106.68 ; JP51.8@90.685,106.941 ccw(c91.315,107.571) 91.315,106.68 ; JP51.8@90.865,106.239 cw(c91.928,105.176) 91.928,106.68 ; JP51.8@90.865,106.239 cw(c91.928,105.176) 91.928,106.68 ; JP51.8@90.865,106.239 cw(c91.928,105.176) 91.928,106.68 ; JP51.8@90.865,107.121 ccw(c91.928,108.184) 91.928,106.68 ; JP51.8@90.865,107.121 ccw(c91.928,108.184) 91.928,106.68 ; JP51.8@90.865,107.121 ccw(c91.928,108.184) 91.928,106.68 ; 91.46,106.68 cw(c91.46,105.176) JP51.10@92.523,106.239 ; 91.46,106.68 ccw(c91.46,108.184) JP51.10@92.523,107.121 ; 91.46,106.68 cw(c91.46,105.176) JP51.10@92.523,106.239 ; 91.46,106.68 ccw(c91.46,108.184) JP51.10@92.523,107.121 ; 91.46,106.68 cw(c91.46,105.176) JP51.10@92.523,106.239 ; 91.46,106.68 ccw(c91.46,108.184) JP51.10@92.523,107.121 ; 92.073,106.68 cw(c92.073,105.789) JP51.10@92.703,106.419 ; 92.073,106.68 ccw(c92.073,107.571) JP51.10@92.703,106.941 ; 92.073,106.68 cw(c92.073,105.789) JP51.10@92.703,106.419 ; 92.073,106.68 ccw(c92.073,107.571) JP51.10@92.703,106.941 ; 92.073,106.68 cw(c92.073,105.789) JP51.10@92.703,106.419 ; 92.073,106.68 ccw(c92.073,107.571) JP51.10@92.703,106.941 ; 95.964,70.66 cw(c94.901,69.596) JP3.9@96.405,69.596 ; 95.964,70.66 ccw(c97.028,71.723) JP3.9@97.028,70.219 ; 95.964,70.66 cw(c94.901,69.596) JP3.9@96.405,69.596 ; 95.964,70.66 ccw(c97.028,71.723) JP3.9@97.028,70.219 ; 95.964,70.66 cw(c94.901,69.596) JP3.9@96.405,69.596 ; 95.964,70.66 ccw(c97.028,71.723) JP3.9@97.028,70.219 ; 96.398,70.226 cw(c95.768,69.596) JP3.9@96.659,69.596 ; 96.398,70.226 ccw(c97.028,70.856) JP3.9@97.028,69.965 ; 96.398,70.226 cw(c95.768,69.596) JP3.9@96.659,69.596 ; 96.398,70.226 ccw(c97.028,70.856) JP3.9@97.028,69.965 ; 96.398,70.226 cw(c95.768,69.596) JP3.9@96.659,69.596 ; 96.398,70.226 ccw(c97.028,70.856) JP3.9@97.028,69.965
  Bottom Layer w0.254: J61.5@59.18,78.184 61.029,76.335 61.029,56.88 60.782,56.633 60.782,50.038 61.037,49.783 ; U4.15@61.972,49.783 61.037,49.783 ; JP6.2@66.04,113.792 66.04,105.156 66.548,104.648 JP2.9@66.548,95.504 ; JP4.1@66.548,49.276 66.548,42.926 66.802,42.672 66.802,34.798 C4.1@68.072,33.528 ; JP6.1@68.58,113.792 70.536,111.836 70.536,111.328 D2.2@75.184,106.68 ; C16.2@84.709,64.643 83.744,65.608 83.744,71.298 C15.2@84.709,72.263 ; key.1@87.376,30.48 92.71,35.814 C7.2@92.71,40.64 ; JP51.10@92.964,106.68 97.028,102.616 JP1.1@97.028,95.504 98.171,94.361 98.171,70.739 JP3.9@97.028,69.596 ; J61.5@59.18,77.466 cw(c59.18,75.733) 60.406,76.958 ; J61.5@59.18,77.466 cw(c59.18,75.733) 60.406,76.958 ; J61.5@59.18,77.466 cw(c59.18,75.733) 60.406,76.958 ; J61.5@59.18,77.72 cw(c59.18,76.6) 59.972,77.392 ; J61.5@59.18,77.72 cw(c59.18,76.6) 59.972,77.392 ; J61.5@59.18,77.72 cw(c59.18,76.6) 59.972,77.392 ; J61.5@59.644,78.184 ccw(c60.764,78.184) 59.972,77.392 ; J61.5@59.644,78.184 ccw(c60.764,78.184) 59.972,77.392 ; J61.5@59.644,78.184 ccw(c60.764,78.184) 59.972,77.392 ; J61.5@59.898,78.184 ccw(c61.631,78.184) 60.406,76.958 ; J61.5@59.898,78.184 ccw(c61.631,78.184) 60.406,76.958 ; J61.5@59.898,78.184 ccw(c61.631,78.184) 60.406,76.958 ; 61.037,49.783 cw(c61.037,49.433) U4.15@61.356,49.577 ; 61.037,49.783 ccw(c61.037,50.133) U4.15@61.356,49.989 ; 61.037,49.783 cw(c61.037,49.433) U4.15@61.356,49.577 ; 61.037,49.783 ccw(c61.037,50.133) U4.15@61.356,49.989 ; 61.037,49.783 cw(c61.037,49.433) U4.15@61.356,49.577 ; 61.037,49.783 ccw(c61.037,50.133) U4.15@61.356,49.989 ; JP6.2@65.599,113.351 cw(c64.536,112.288) 66.04,112.288 ; JP6.2@65.599,113.351 cw(c64.536,112.288) 66.04,112.288 ; JP6.2@65.599,113.351 cw(c64.536,112.288) 66.04,112.288 ; JP6.2@65.779,113.531 cw(c65.149,112.901) 66.04,112.901 ; JP6.2@65.779,113.531 cw(c65.149,112.901) 66.04,112.901 ; JP6.2@65.779,113.531 cw(c65.149,112.901) 66.04,112.901 ; 66.04,112.288 cw(c67.544,112.288) JP6.2@66.481,113.351 ; 66.04,112.288 cw(c67.544,112.288) JP6.2@66.481,113.351 ; 66.04,112.288 cw(c67.544,112.288) JP6.2@66.481,113.351 ; 66.04,112.901 cw(c66.931,112.901) JP6.2@66.301,113.531 ; 66.04,112.901 cw(c66.931,112.901) JP6.2@66.301,113.531 ; 66.04,112.901 cw(c66.931,112.901) JP6.2@66.301,113.531 ; JP4.1@66.107,48.835 cw(c65.044,47.772) 66.548,47.772 ; JP4.1@66.107,48.835 cw(c65.044,47.772) 66.548,47.772 ; JP4.1@66.107,48.835 cw(c65.044,47.772) 66.548,47.772 ; JP2.9@66.107,95.945 ccw(c65.044,97.008) 66.548,97.008 ; JP2.9@66.107,95.945 ccw(c65.044,97.008) 66.548,97.008 ; JP2.9@66.107,95.945 ccw(c65.044,97.008) 66.548,97.008 ; JP4.1@66.287,49.015 cw(c65.657,48.385) 66.548,48.385 ; JP4.1@66.287,49.015 cw(c65.657,48.385) 66.548,48.385 ; JP4.1@66.287,49.015 cw(c65.657,48.385) 66.548,48.385 ; JP2.9@66.287,95.765 ccw(c65.657,96.395) 66.548,96.395 ; JP2.9@66.287,95.765 ccw(c65.657,96.395) 66.548,96.395 ; JP2.9@66.287,95.765 ccw(c65.657,96.395) 66.548,96.395 ; 66.548,47.772 cw(c68.052,47.772) JP4.1@66.989,48.835 ; 66.548,47.772 cw(c68.052,47.772) JP4.1@66.989,48.835 ; 66.548,47.772 cw(c68.052,47.772) JP4.1@66.989,48.835 ; 66.548,48.385 cw(c67.439,48.385) JP4.1@66.809,49.015 ; 66.548,48.385 cw(c67.439,48.385) JP4.1@66.809,49.015 ; 66.548,48.385 cw(c67.439,48.385) JP4.1@66.809,49.015 ; 66.548,96.395 ccw(c67.439,96.395) JP2.9@66.809,95.765 ; 66.548,96.395 ccw(c67.439,96.395) JP2.9@66.809,95.765 ; 66.548,96.395 ccw(c67.439,96.395) JP2.9@66.809,95.765 ; 66.548,97.008 ccw(c68.052,97.008) JP2.9@66.989,95.945 ; 66.548,97.008 ccw(c68.052,97.008) JP2.9@66.989,95.945 ; 66.548,97.008 ccw(c68.052,97.008) JP2.9@66.989,95.945 ; 67.205,34.395 cw(c66.338,33.528) C4.1@67.564,33.528 ; 67.205,34.395 ccw(c68.072,35.262) C4.1@68.072,34.036 ; 67.205,34.395 cw(c66.338,33.528) C4.1@67.564,33.528 ; 67.205,34.395 ccw(c68.072,35.262) C4.1@68.072,34.036 ; 67.205,34.395 cw(c66.338,33.528) C4.1@67.564,33.528 ; 67.205,34.395 ccw(c68.072,35.262) C4.1@68.072,34.036 ; JP6.1@68.58,113.169 cw(c68.58,111.665) 69.644,112.728 ; JP6.1@68.58,113.169 cw(c68.58,111.665) 69.644,112.728 ; JP6.1@68.58,113.169 cw(c68.58,111.665) 69.644,112.728 ; JP6.1@68.58,113.423 cw(c68.58,112.532) JP6.1@69.21,113.162 ; JP6.1@68.58,113.423 cw(c68.58,112.532) JP6.1@69.21,113.162 ; JP6.1@68.58,113.423 cw(c68.58,112.532) JP6.1@69.21,113.162 ; JP6.1@68.949,113.792 ccw(c69.84,113.792) JP6.1@69.21,113.162 ; JP6.1@68.949,113.792 ccw(c69.84,113.792) JP6.1@69.21,113.162 ; JP6.1@68.949,113.792 ccw(c69.84,113.792) JP6.1@69.21,113.162 ; JP6.1@69.203,113.792 ccw(c70.707,113.792) 69.644,112.728 ; JP6.1@69.203,113.792 ccw(c70.707,113.792) 69.644,112.728 ; JP6.1@69.203,113.792 ccw(c70.707,113.792) 69.644,112.728 ; 74.317,107.547 cw(c73.45,106.68) D2.2@74.676,106.68 ; 74.317,107.547 ccw(c75.184,108.414) D2.2@75.184,107.188 ; 74.317,107.547 cw(c73.45,106.68) D2.2@74.676,106.68 ; 74.317,107.547 ccw(c75.184,108.414) D2.2@75.184,107.188 ; 74.317,107.547 cw(c73.45,106.68) D2.2@74.676,106.68 ; 74.317,107.547 ccw(c75.184,108.414) D2.2@75.184,107.188 ; 83.95,65.402 cw(c83.191,64.643) C16.2@84.264,64.643 ; 83.95,65.402 ccw(c84.709,66.161) C16.2@84.709,65.087 ; 83.95,65.402 cw(c83.191,64.643) C16.2@84.264,64.643 ; 83.95,65.402 ccw(c84.709,66.161) C16.2@84.709,65.087 ; 83.95,65.402 cw(c83.191,64.643) C16.2@84.264,64.643 ; 83.95,65.402 ccw(c84.709,66.161) C16.2@84.709,65.087 ; 83.95,71.504 cw(c84.709,70.745) C15.2@84.709,71.819 ; 83.95,71.504 ccw(c83.191,72.263) C15.2@84.264,72.263 ; 83.95,71.504 cw(c84.709,70.745) C15.2@84.709,71.819 ; 83.95,71.504 ccw(c83.191,72.263) C15.2@84.264,72.263 ; 83.95,71.504 cw(c84.709,70.745) C15.2@84.709,71.819 ; 83.95,71.504 ccw(c83.191,72.263) C15.2@84.264,72.263 ; key.1@87.376,30.861 ccw(c87.376,31.781) 88.026,31.13 ; key.1@87.376,30.861 ccw(c87.376,31.781) 88.026,31.13 ; key.1@87.376,30.861 ccw(c87.376,31.781) 88.026,31.13 ; key.1@87.376,31.115 ccw(c87.376,32.648) 88.46,31.564 ; key.1@87.376,31.115 ccw(c87.376,32.648) 88.46,31.564 ; key.1@87.376,31.115 ccw(c87.376,32.648) 88.46,31.564 ; key.1@87.757,30.48 cw(c88.677,30.48) 88.026,31.13 ; key.1@87.757,30.48 cw(c88.677,30.48) 88.026,31.13 ; key.1@87.757,30.48 cw(c88.677,30.48) 88.026,31.13 ; key.1@88.011,30.48 cw(c89.544,30.48) 88.46,31.564 ; key.1@88.011,30.48 cw(c89.544,30.48) 88.46,31.564 ; key.1@88.011,30.48 cw(c89.544,30.48) 88.46,31.564 ; C7.2@92.351,40.281 cw(c91.484,39.414) 92.71,39.414 ; C7.2@92.351,40.281 cw(c91.484,39.414) 92.71,39.414 ; C7.2@92.351,40.281 cw(c91.484,39.414) 92.71,39.414 ; 92.71,39.414 cw(c93.936,39.414) C7.2@93.069,40.281 ; 92.71,39.414 cw(c93.936,39.414) C7.2@93.069,40.281 ; 92.71,39.414 cw(c93.936,39.414) C7.2@93.069,40.281 ; JP51.10@92.964,106.057 cw(c92.964,104.553) 94.028,105.616 ; JP51.10@92.964,106.057 cw(c92.964,104.553) 94.028,105.616 ; JP51.10@92.964,106.057 cw(c92.964,104.553) 94.028,105.616 ; JP51.10@92.964,106.311 cw(c92.964,105.42) 93.594,106.05 ; JP51.10@92.964,106.311 cw(c92.964,105.42) 93.594,106.05 ; JP51.10@92.964,106.311 cw(c92.964,105.42) 93.594,106.05 ; JP51.10@93.333,106.68 ccw(c94.224,106.68) 93.594,106.05 ; JP51.10@93.333,106.68 ccw(c94.224,106.68) 93.594,106.05 ; JP51.10@93.333,106.68 ccw(c94.224,106.68) 93.594,106.05 ; JP51.10@93.587,106.68 ccw(c95.091,106.68) 94.028,105.616 ; JP51.10@93.587,106.68 ccw(c95.091,106.68) 94.028,105.616 ; JP51.10@93.587,106.68 ccw(c95.091,106.68) 94.028,105.616 ; JP1.1@96.587,95.945 ccw(c95.524,97.008) 97.028,97.008 ; JP1.1@96.587,95.945 ccw(c95.524,97.008) 97.028,97.008 ; JP1.1@96.587,95.945 ccw(c95.524,97.008) 97.028,97.008 ; JP1.1@96.767,95.765 ccw(c96.137,96.395) 97.028,96.395 ; JP1.1@96.767,95.765 ccw(c96.137,96.395) 97.028,96.395 ; JP1.1@96.767,95.765 ccw(c96.137,96.395) 97.028,96.395 ; JP3.9@97.028,69.965 ccw(c97.028,70.856) 97.658,70.226 ; JP3.9@97.028,69.965 ccw(c97.028,70.856) 97.658,70.226 ; JP3.9@97.028,69.965 ccw(c97.028,70.856) 97.658,70.226 ; JP3.9@97.028,70.219 ccw(c97.028,71.723) 98.092,70.66 ; JP3.9@97.028,70.219 ccw(c97.028,71.723) 98.092,70.66 ; JP3.9@97.028,70.219 ccw(c97.028,71.723) 98.092,70.66 ; JP1.1@97.028,94.881 cw(c97.028,93.377) 98.092,94.44 ; JP1.1@97.028,94.881 cw(c97.028,93.377) 98.092,94.44 ; JP1.1@97.028,94.881 cw(c97.028,93.377) 98.092,94.44 ; JP1.1@97.028,95.135 cw(c97.028,94.244) JP1.1@97.658,94.874 ; JP1.1@97.028,95.135 cw(c97.028,94.244) JP1.1@97.658,94.874 ; JP1.1@97.028,95.135 cw(c97.028,94.244) JP1.1@97.658,94.874 ; 97.028,96.395 ccw(c97.919,96.395) JP1.1@97.289,95.765 ; 97.028,96.395 ccw(c97.919,96.395) JP1.1@97.289,95.765 ; 97.028,96.395 ccw(c97.919,96.395) JP1.1@97.289,95.765 ; 97.028,97.008 ccw(c98.532,97.008) JP1.1@97.469,95.945 ; 97.028,97.008 ccw(c98.532,97.008) JP1.1@97.469,95.945 ; 97.028,97.008 ccw(c98.532,97.008) JP1.1@97.469,95.945 ; JP3.9@97.397,69.596 cw(c98.288,69.596) 97.658,70.226 ; JP3.9@97.397,69.596 cw(c98.288,69.596) 97.658,70.226 ; JP3.9@97.397,69.596 cw(c98.288,69.596) 97.658,70.226 ; JP1.1@97.397,95.504 ccw(c98.288,95.504) JP1.1@97.658,94.874 ; JP1.1@97.397,95.504 ccw(c98.288,95.504) JP1.1@97.658,94.874 ; JP1.1@97.397,95.504 ccw(c98.288,95.504) JP1.1@97.658,94.874 ; JP3.9@97.651,69.596 cw(c99.155,69.596) 98.092,70.66 ; JP3.9@97.651,69.596 cw(c99.155,69.596) 98.092,70.66 ; JP3.9@97.651,69.596 cw(c99.155,69.596) 98.092,70.66 ; JP1.1@97.651,95.504 ccw(c99.155,95.504) 98.092,94.44 ; JP1.1@97.651,95.504 ccw(c99.155,95.504) 98.092,94.44 ; JP1.1@97.651,95.504 ccw(c99.155,95.504) 98.092,94.44
Net1_3: C6.1 JP51.5 key.3 R1.2 U3.9 | length 215.1
  Top Layer w0.254: R1.2@57.911,93.984 59.079,95.152 61.21,95.152 62.001,94.361 67.031,94.361 67.691,95.021 78.765,95.021 JP51.5@87.884,104.14 ; C6.1@79.248,33.528 81.28,35.56 key.3@87.376,35.56 ; R1.2@57.911,94.39 ccw(c57.911,95.371) 58.605,94.678 ; R1.2@57.911,94.39 ccw(c57.911,95.371) 58.605,94.678 ; R1.2@57.911,94.39 ccw(c57.911,95.371) 58.605,94.678 ; R1.2@57.911,94.644 ccw(c57.911,96.239) 59.038,95.111 ; R1.2@57.911,94.644 ccw(c57.911,96.239) 59.038,95.111 ; R1.2@57.911,94.644 ccw(c57.911,96.239) 59.038,95.111 ; R1.2@58.317,93.984 cw(c59.299,93.984) 58.605,94.678 ; R1.2@58.317,93.984 cw(c59.299,93.984) 58.605,94.678 ; R1.2@58.317,93.984 cw(c59.299,93.984) 58.605,94.678 ; R1.2@58.571,93.984 cw(c60.166,93.984) 59.038,95.111 ; R1.2@58.571,93.984 cw(c60.166,93.984) 59.038,95.111 ; R1.2@58.571,93.984 cw(c60.166,93.984) 59.038,95.111 ; C6.1@79.248,34.036 ccw(c79.248,35.262) 80.115,34.395 ; C6.1@79.248,34.036 ccw(c79.248,35.262) 80.115,34.395 ; C6.1@79.248,34.036 ccw(c79.248,35.262) 80.115,34.395 ; C6.1@79.756,33.528 cw(c80.982,33.528) 80.115,34.395 ; C6.1@79.756,33.528 cw(c80.982,33.528) 80.115,34.395 ; C6.1@79.756,33.528 cw(c80.982,33.528) 80.115,34.395 ; 85.843,35.56 cw(c85.843,34.027) key.3@86.927,35.111 ; 85.843,35.56 ccw(c85.843,37.093) key.3@86.927,36.009 ; 85.843,35.56 cw(c85.843,34.027) key.3@86.927,35.111 ; 85.843,35.56 ccw(c85.843,37.093) key.3@86.927,36.009 ; 85.843,35.56 cw(c85.843,34.027) key.3@86.927,35.111 ; 85.843,35.56 ccw(c85.843,37.093) key.3@86.927,36.009 ; 86.456,35.56 cw(c86.456,34.64) key.3@87.107,35.291 ; 86.456,35.56 ccw(c86.456,36.48) key.3@87.107,35.829 ; 86.456,35.56 cw(c86.456,34.64) key.3@87.107,35.291 ; 86.456,35.56 ccw(c86.456,36.48) key.3@87.107,35.829 ; 86.456,35.56 cw(c86.456,34.64) key.3@87.107,35.291 ; 86.456,35.56 ccw(c86.456,36.48) key.3@87.107,35.829 ; 86.82,103.076 cw(c87.884,102.013) JP51.5@87.884,103.517 ; 86.82,103.076 ccw(c85.757,104.14) JP51.5@87.261,104.14 ; 86.82,103.076 cw(c87.884,102.013) JP51.5@87.884,103.517 ; 86.82,103.076 ccw(c85.757,104.14) JP51.5@87.261,104.14 ; 86.82,103.076 cw(c87.884,102.013) JP51.5@87.884,103.517 ; 86.82,103.076 ccw(c85.757,104.14) JP51.5@87.261,104.14 ; 87.254,103.51 cw(c87.884,102.88) JP51.5@87.884,103.771 ; 87.254,103.51 ccw(c86.624,104.14) JP51.5@87.515,104.14 ; 87.254,103.51 cw(c87.884,102.88) JP51.5@87.884,103.771 ; 87.254,103.51 ccw(c86.624,104.14) JP51.5@87.515,104.14 ; 87.254,103.51 cw(c87.884,102.88) JP51.5@87.884,103.771 ; 87.254,103.51 ccw(c86.624,104.14) JP51.5@87.515,104.14
  Bottom Layer w0.254: R1.2@57.911,93.984 60.731,96.804 60.731,101.6 61.874,102.743 65.532,102.743 66.04,102.235 66.04,97.282 65.405,96.647 65.405,84.836 66.04,84.201 67.056,84.201 67.691,83.566 67.691,82.423 U3.9@74.168,75.946 78.105,72.009 78.105,34.671 C6.1@79.248,33.528 ; R1.2@57.911,94.39 ccw(c57.911,95.371) 58.605,94.678 ; R1.2@57.911,94.39 ccw(c57.911,95.371) 58.605,94.678 ; R1.2@57.911,94.39 ccw(c57.911,95.371) 58.605,94.678 ; R1.2@57.911,94.644 ccw(c57.911,96.239) 59.038,95.111 ; R1.2@57.911,94.644 ccw(c57.911,96.239) 59.038,95.111 ; R1.2@57.911,94.644 ccw(c57.911,96.239) 59.038,95.111 ; R1.2@58.317,93.984 cw(c59.299,93.984) 58.605,94.678 ; R1.2@58.317,93.984 cw(c59.299,93.984) 58.605,94.678 ; R1.2@58.317,93.984 cw(c59.299,93.984) 58.605,94.678 ; R1.2@58.571,93.984 cw(c60.166,93.984) 59.038,95.111 ; R1.2@58.571,93.984 cw(c60.166,93.984) 59.038,95.111 ; R1.2@58.571,93.984 cw(c60.166,93.984) 59.038,95.111 ; 73.104,77.01 cw(c72.041,75.946) U3.9@73.545,75.946 ; 73.104,77.01 ccw(c74.168,78.073) U3.9@74.168,76.569 ; 73.104,77.01 cw(c72.041,75.946) U3.9@73.545,75.946 ; 73.104,77.01 ccw(c74.168,78.073) U3.9@74.168,76.569 ; 73.104,77.01 cw(c72.041,75.946) U3.9@73.545,75.946 ; 73.104,77.01 ccw(c74.168,78.073) U3.9@74.168,76.569 ; 73.538,76.576 cw(c72.908,75.946) U3.9@73.799,75.946 ; 73.538,76.576 ccw(c74.168,77.206) U3.9@74.168,76.315 ; 73.538,76.576 cw(c72.908,75.946) U3.9@73.799,75.946 ; 73.538,76.576 ccw(c74.168,77.206) U3.9@74.168,76.315 ; 73.538,76.576 cw(c72.908,75.946) U3.9@73.799,75.946 ; 73.538,76.576 ccw(c74.168,77.206) U3.9@74.168,76.315 ; U3.9@74.168,75.323 cw(c74.168,73.819) 75.232,74.882 ; U3.9@74.168,75.323 cw(c74.168,73.819) 75.232,74.882 ; U3.9@74.168,75.323 cw(c74.168,73.819) 75.232,74.882 ; U3.9@74.168,75.577 cw(c74.168,74.686) 74.798,75.316 ; U3.9@74.168,75.577 cw(c74.168,74.686) 74.798,75.316 ; U3.9@74.168,75.577 cw(c74.168,74.686) 74.798,75.316 ; U3.9@74.537,75.946 ccw(c75.428,75.946) 74.798,75.316 ; U3.9@74.537,75.946 ccw(c75.428,75.946) 74.798,75.316 ; U3.9@74.537,75.946 ccw(c75.428,75.946) 74.798,75.316 ; U3.9@74.791,75.946 ccw(c76.295,75.946) 75.232,74.882 ; U3.9@74.791,75.946 ccw(c76.295,75.946) 75.232,74.882 ; U3.9@74.791,75.946 ccw(c76.295,75.946) 75.232,74.882 ; 78.381,34.395 cw(c77.514,33.528) C6.1@78.74,33.528 ; 78.381,34.395 ccw(c79.248,35.262) C6.1@79.248,34.036 ; 78.381,34.395 cw(c77.514,33.528) C6.1@78.74,33.528 ; 78.381,34.395 ccw(c79.248,35.262) C6.1@79.248,34.036 ; 78.381,34.395 cw(c77.514,33.528) C6.1@78.74,33.528 ; 78.381,34.395 ccw(c79.248,35.262) C6.1@79.248,34.036